# Altium PCB STM32-V5_PCB封装(PADS 2005).PcbDoc (part 2 of 2)
Units mil, origin at the board's own origin, x right, y up, seen from the top; angles counter-clockwise.
Board outline 7066.93 x 5511.81 mil, 2 copper layers (Top, BOTTOM), stack 4.02 mil thick; 397 components, 352 nets, 1643 pads, 387 vias.
Unrouted connection lines stored in the file: 1.
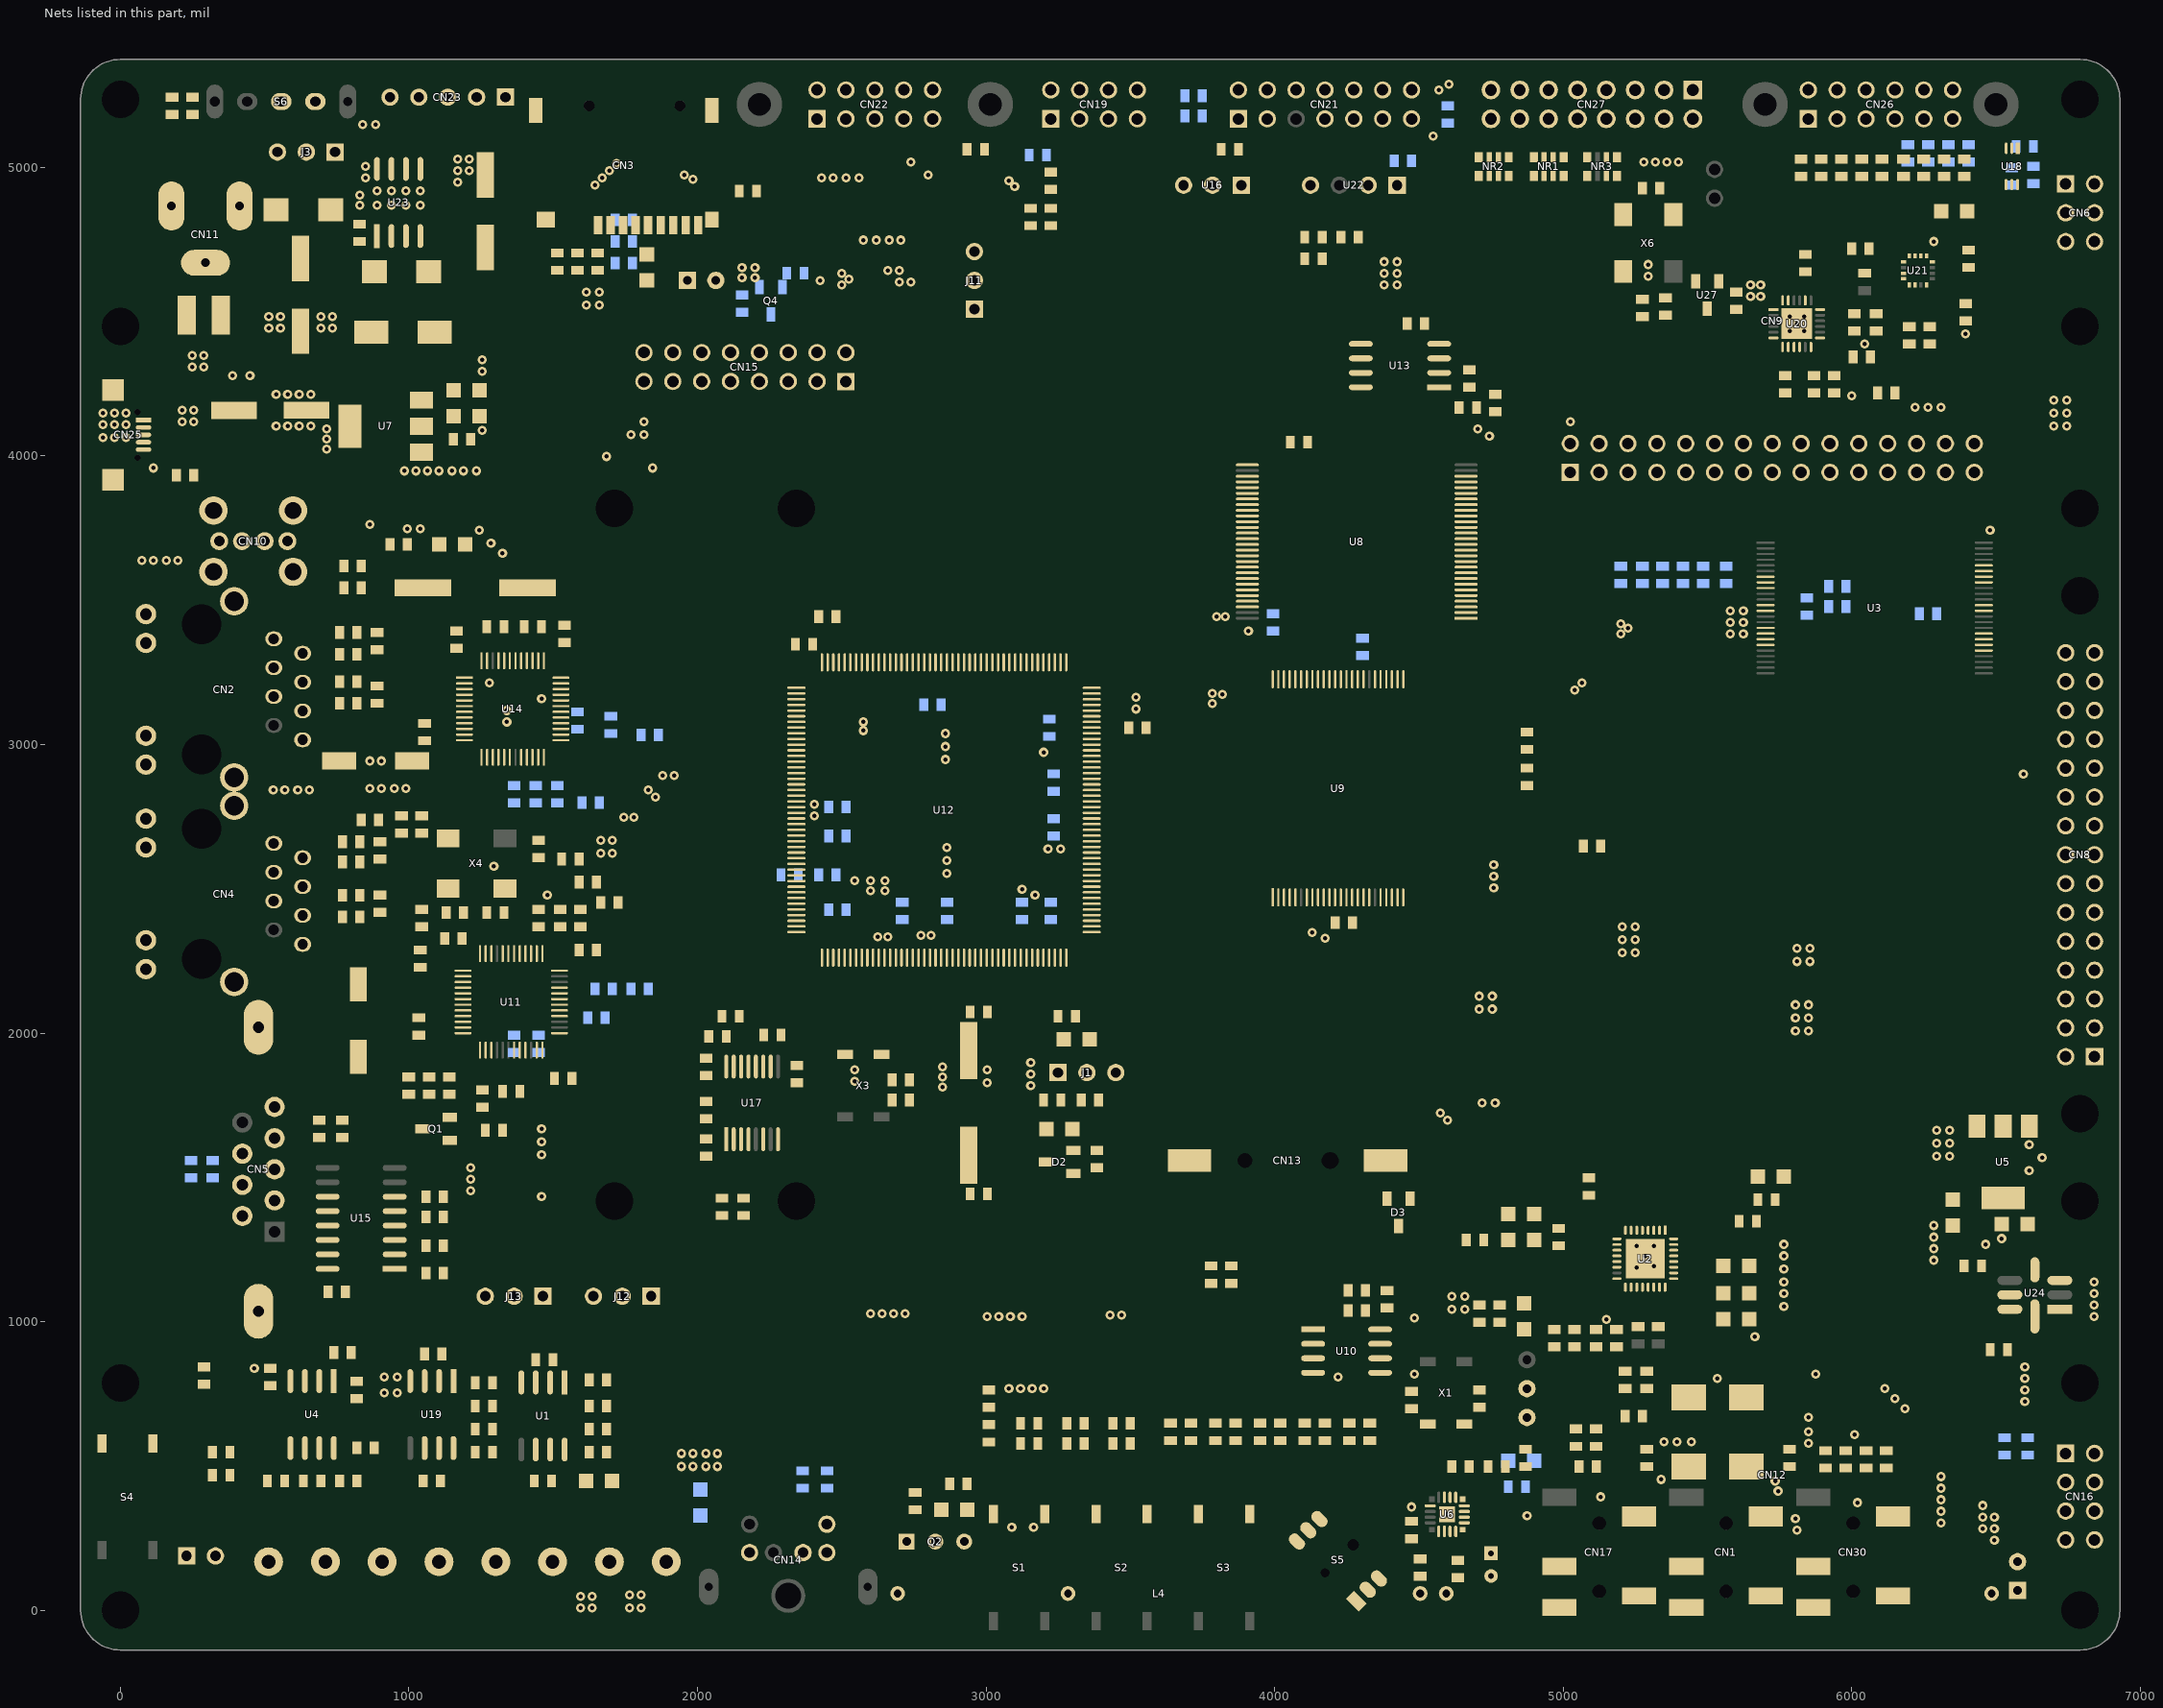
[diagram p2: the nets of this part, all layers, seen from the top]

## Footprints (in the part's own frame and the unit in brackets; to place one, negate y for a bottom-side part, rotate by r counter-clockwise, add the part's x,y. Pads: shape width x height; smd on the part's side, far side on the other; paste and mask are expansions set on the pad) (continued)
MODULE-WIFI/88W8686/10P/2.54MM(PAI-MU) [mil]
  rect 60x60 hole 40: 1(-200,0)
  round 60 hole 40: 2(-200,100) 3(-100,0) 4(-100,100) 5(0,0) 6(0,100) 7(100,0) 8(100,100) 9(200,0) 10(200,100)
  round 157.48 hole 78.74: 11(400,50) 12(-400,50)
  silkscreen extent -297,-50 275,150
NR-0603N-JL [mm]
  rect 0.71x0.89 smd: 1(-1.31,-0.825) 2(-1.31,0.825) 7(1.31,-0.825) 8(1.31,0.825)
  rect 0.46x0.89 smd: 3(-0.395,-0.825) 4(-0.395,0.825) 5(0.395,-0.825) 6(0.395,0.825)
  silkscreen extent -2.1,-1.65 2.1,1.65
O-SW/SS-12F45 [mm]
  oval 1.8x1.5 hole 0.9 slot 1.2 at 0 deg: 1(0,0) 2(3,0) 3(6,0)
  oval 1.5x3 hole 0.9 slot 2.4 at 90 deg: 4(-2.85,0)
  oval 1.5x3 hole 0.8 slot 2.4 at 90 deg: 5(8.85,0)
  silkscreen extent -2.85,-2.8 8.85,2.8
Q-IR-RECIVER/HS0038B-JL [mm]
  rect 1.4x1.4 hole 0.762: 1(-2.54,0)
  round 1.4 hole 0.762: 2(0,0) 3(2.54,0)
  silkscreen extent -3.4,-4.36 3.4,1.02
Q-红外发射-04/C-JL [mil]
  rect 60x60 hole 30: 1(0,49.21)
  round 60 hole 30: 2(0,-49.21)
  silkscreen extent -92,-96 127,131
QFN24-0.5-JL [mm]
  rect 0.9x0.25 smd: 1(-2.05,1.25)
  oval 0.9x0.25 smd: 2(-2.05,0.75) 3(-2.05,0.25) 4(-2.05,-0.25) 5(-2.05,-0.75) 6(-2.05,-1.25) 13(2.05,-1.25) 14(2.05,-0.75) 15(2.05,-0.25) 16(2.05,0.25) 17(2.05,0.75) 18(2.05,1.25)
  oval 0.25x0.9 smd: 7(-1.25,-2.05) 8(-0.75,-2.05) 9(-0.25,-2.05) 10(0.25,-2.05) 11(0.75,-2.05) 12(1.25,-2.05) 19(1.25,2.05) 20(0.75,2.05) 21(0.25,2.05) 22(-0.25,2.05) 23(-0.75,2.05) 24(-1.25,2.05)
  rect 2.7x2.7 smd: 25(0,0)
  silkscreen extent -3,-2 2,2.02
QFN32-0.5-JL [mm]
  rect 0.8x0.25 smd: 1(-2.5,1.75)
  oval 0.8x0.25 smd: 2(-2.5,1.25) 3(-2.5,0.75) 4(-2.5,0.25) 5(-2.5,-0.25) 6(-2.5,-0.75) 7(-2.5,-1.25) 8(-2.5,-1.75) 17(2.5,-1.75) 18(2.5,-1.25) 19(2.5,-0.75) 20(2.5,-0.25) 21(2.5,0.25) 22(2.5,0.75) 23(2.5,1.25) 24(2.5,1.75)
  oval 0.25x0.8 smd: 9(-1.75,-2.5) 10(-1.25,-2.5) 11(-0.75,-2.5) 12(-0.25,-2.5) 13(0.25,-2.5) 14(0.75,-2.5) 15(1.25,-2.5) 16(1.75,-2.5) 25(1.75,2.5) 26(1.25,2.5) 27(0.75,2.5) 28(0.25,2.5) 29(-0.25,2.5) 30(-0.75,2.5) 31(-1.25,2.5) 32(-1.75,2.5)
  rect 3.45x3.45 smd: 33(0,0)
  silkscreen extent -3.5,-2.5 2.51,2.51
QFP48-0.5-JL [mm]
  rect 0.2x1.5 smd: 1(2.75,4.25)
  oval 0.2x1.5 smd: 2(2.25,4.25) 3(1.75,4.25) 4(1.25,4.25) 5(0.75,4.25) 6(0.25,4.25) 7(-0.25,4.25) 8(-0.75,4.25) 9(-1.25,4.25) 10(-1.75,4.25) 11(-2.25,4.25) 12(-2.75,4.25) 25(-2.75,-4.25) 26(-2.25,-4.25) 27(-1.75,-4.25) 28(-1.25,-4.25) 29(-0.75,-4.25) 30(-0.25,-4.25) 31(0.25,-4.25) 32(0.75,-4.25) 33(1.25,-4.25) 34(1.75,-4.25) 35(2.25,-4.25) 36(2.75,-4.25)
  oval 1.5x0.2 smd: 13(-4.25,2.75) 14(-4.25,2.25) 15(-4.25,1.75) 16(-4.25,1.25) 17(-4.25,0.75) 18(-4.25,0.25) 19(-4.25,-0.25) 20(-4.25,-0.75) 21(-4.25,-1.25) 22(-4.25,-1.75) 23(-4.25,-2.25) 24(-4.25,-2.75) 37(4.25,-2.75) 38(4.25,-2.25) 39(4.25,-1.75) 40(4.25,-1.25) 41(4.25,-0.75) 42(4.25,-0.25) 43(4.25,0.25) 44(4.25,0.75) 45(4.25,1.25) 46(4.25,1.75) 47(4.25,2.25) 48(4.25,2.75)
  silkscreen extent -2.97,-2.96 3.24,5.85
SO8N-JL [mm]
  rect 0.508x2.1 smd: 1(-1.905,-2.95)
  oval 0.508x2.1 smd: 2(-0.635,-2.95) 3(0.635,-2.95) 4(1.905,-2.95) 5(1.905,2.95) 6(0.635,2.95) 7(-0.635,2.95) 8(-1.905,2.95)
  silkscreen extent -2.41,-1.65 2.41,1.65
SO8N-W-JL [mm]
  rect 0.508x2.1 smd: 1(-1.905,-3.45)
  oval 0.508x2.1 smd: 2(-0.635,-3.45) 3(0.635,-3.45) 4(1.905,-3.45) 5(1.905,3.45) 6(0.635,3.45) 7(-0.635,3.45) 8(-1.905,3.45)
  silkscreen extent -2.41,-1.65 2.41,1.65
SO16N-JL [mm]
  rect 0.508x2.1 smd: 1(-4.445,-2.95)
  oval 0.508x2.1 smd: 2(-3.175,-2.95) 3(-1.905,-2.95) 4(-0.635,-2.95) 5(0.635,-2.95) 6(1.905,-2.95) 7(3.175,-2.95) 8(4.445,-2.95) 9(4.445,2.95) 10(3.175,2.95) 11(1.905,2.95) 12(0.635,2.95) 13(-0.635,2.95) 14(-1.905,2.95) 15(-3.175,2.95) 16(-4.445,2.95)
  silkscreen extent -4.95,-1.65 4.95,1.65
SOD106-JL [mm]
  rect 2.2x2.032 smd: 1(2.4,0) 2(-2.4,0)
  silkscreen extent -3.8,-1.52 3.7,1.52
SOP16-0.65-JL [mm]
  rect 0.35x2.1 smd: 1(-2.275,-3.2)
  oval 0.35x2.1 smd: 2(-1.625,-3.2) 3(-0.975,-3.2) 4(-0.325,-3.2) 5(0.325,-3.2) 6(0.975,-3.2) 7(1.625,-3.2) 8(2.275,-3.2) 9(2.275,3.2) 10(1.625,3.2) 11(0.975,3.2) 12(0.325,3.2) 13(-0.325,3.2) 14(-0.975,3.2) 15(-1.625,3.2) 16(-2.275,3.2)
  silkscreen extent -2.91,-4.72 2.91,4.69
SOP48-0.5/NAND_FLASH [mm]
  rect 0.2x1.6 smd: 1(-5.75,-9.6)
  oval 0.2x1.6 smd: 2(-5.25,-9.6) 3(-4.75,-9.6) 4(-4.25,-9.6) 5(-3.75,-9.6) 6(-3.25,-9.6) 7(-2.75,-9.6) 8(-2.25,-9.6) 9(-1.75,-9.6) 10(-1.25,-9.6) 11(-0.75,-9.6) 12(-0.25,-9.6) 13(0.25,-9.6) 14(0.75,-9.6) 15(1.25,-9.6) 16(1.75,-9.6) 17(2.25,-9.6) 18(2.75,-9.6) 19(3.25,-9.6) 20(3.75,-9.6) 21(4.25,-9.6) 22(4.75,-9.6) 23(5.25,-9.6) 24(5.75,-9.6) 25(5.75,9.6) 26(5.25,9.6) 27(4.75,9.6) 28(4.25,9.6) 29(3.75,9.6) 30(3.25,9.6) 31(2.75,9.6) 32(2.25,9.6) 33(1.75,9.6) 34(1.25,9.6) 35(0.75,9.6) 36(0.25,9.6) 37(-0.25,9.6) 38(-0.75,9.6) 39(-1.25,9.6) 40(-1.75,9.6) 41(-2.25,9.6) 42(-2.75,9.6) 43(-3.25,9.6) 44(-3.75,9.6) 45(-4.25,9.6) 46(-4.75,9.6) 47(-5.25,9.6) 48(-5.75,9.6)
  silkscreen extent -6.35,-8.6 6.35,8.6
SOP48-0.5/W-JL [mm]
  rect 0.2x1.6 smd: 1(-5.75,-9.6)
  oval 0.2x1.6 smd: 2(-5.25,-9.6) 3(-4.75,-9.6) 4(-4.25,-9.6) 5(-3.75,-9.6) 6(-3.25,-9.6) 7(-2.75,-9.6) 8(-2.25,-9.6) 9(-1.75,-9.6) 10(-1.25,-9.6) 11(-0.75,-9.6) 12(-0.25,-9.6) 13(0.25,-9.6) 14(0.75,-9.6) 15(1.25,-9.6) 16(1.75,-9.6) 17(2.25,-9.6) 18(2.75,-9.6) 19(3.25,-9.6) 20(3.75,-9.6) 21(4.25,-9.6) 22(4.75,-9.6) 23(5.25,-9.6) 24(5.75,-9.6) 25(5.75,9.6) 26(5.25,9.6) 27(4.75,9.6) 28(4.25,9.6) 29(3.75,9.6) 30(3.25,9.6) 31(2.75,9.6) 32(2.25,9.6) 33(1.75,9.6) 34(1.25,9.6) 35(0.75,9.6) 36(0.25,9.6) 37(-0.25,9.6) 38(-0.75,9.6) 39(-1.25,9.6) 40(-1.75,9.6) 41(-2.25,9.6) 42(-2.75,9.6) 43(-3.25,9.6) 44(-3.75,9.6) 45(-4.25,9.6) 46(-4.75,9.6) 47(-5.25,9.6) 48(-5.75,9.6)
  silkscreen extent -6.35,-10.98 6.35,11.05
SOP56-0.5/W-JL [mil]
  rect 10x80 smd: 1(-265.75,-379)
  oval 10x80 smd: 2(-246.06,-379) 3(-226.38,-379) 4(-206.69,-379) 5(-187.01,-379) 6(-167.32,-379) 7(-147.64,-379) 8(-127.95,-379) 9(-108.27,-379) 10(-88.58,-379) 11(-68.9,-379) 12(-49.21,-379) 13(-29.53,-379) 14(-9.84,-379) 15(9.84,-379) 16(29.53,-379) 17(49.21,-379) 18(68.9,-379) 19(88.58,-379) 20(108.27,-379) 21(127.95,-379) 22(147.64,-379) 23(167.32,-379) 24(187.01,-379) 25(206.69,-379) 26(226.38,-379) 27(246.06,-379) 28(265.75,-379) 29(265.75,379) 30(246.06,379) 31(226.38,379) 32(206.69,379) 33(187.01,379) 34(167.32,379) 35(147.64,379) 36(127.95,379) 37(108.27,379) 38(88.58,379) 39(68.9,379) 40(49.21,379) 41(29.53,379) 42(9.84,379) 43(-9.84,379) 44(-29.53,379) 45(-49.21,379) 46(-68.9,379) 47(-88.58,379) 48(-108.27,379) 49(-127.95,379) 50(-147.64,379) 51(-167.32,379) 52(-187.01,379) 53(-206.69,379) 54(-226.38,379) 55(-246.06,379) 56(-265.75,379)
  silkscreen extent -293,-447 293,447
SOT23-JL [mm]
  rect 1.27x0.8 smd: 1(1.205,-1.015) 2(1.205,1.015) 3(-1.205,0)
  silkscreen extent -1.01,-1.3 0.39,1.3
SOT223-JL [mm]
  rect 2x1.5 smd: 1(3.15,-2.3) 2(3.15,0) 3(3.15,2.3)
  rect 2x3.8 smd: 4(-3.15,0)
  silkscreen extent -1.65,-3.17 1.65,3.17
U-DHT11/2.54/4P [mil]
  rect 60x60 / inner round 60 / far side round 60 hole 36: 1(-150,0)
  round 60 hole 36: 2(-50,0) 3(50,0)
  round 60 / inner rect 60x60 / far side rect 60x60 hole 36: 4(150,0)
  silkscreen extent -248,-138 248,98
U-DS18B20/2.54/3P [mil]
  rect 60x60 hole 36: 1(0,0)
  round 60 hole 36: 2(100,0) 3(200,0)
  silkscreen extent -50,-50 250,100
U-LQFP176-0.5 [mm]
  oval 0.22x1.6 smd: 1(-10.75,-13) 2(-10.25,-13) 3(-9.75,-13) 4(-9.25,-13) 5(-8.75,-13) 6(-8.25,-13) 7(-7.75,-13) 8(-7.25,-13) 9(-6.75,-13) 10(-6.25,-13) 11(-5.75,-13) 12(-5.25,-13) 13(-4.75,-13) 14(-4.25,-13) 15(-3.75,-13) 16(-3.25,-13) 17(-2.75,-13) 18(-2.25,-13) 19(-1.75,-13) 20(-1.25,-13) 21(-0.75,-13) 22(-0.25,-13) 23(0.25,-13) 24(0.75,-13) 25(1.25,-13) 26(1.75,-13) 27(2.25,-13) 28(2.75,-13) 29(3.25,-13) 30(3.75,-13) 31(4.25,-13) 32(4.75,-13) 33(5.25,-13) 34(5.75,-13) 35(6.25,-13) 36(6.75,-13) 37(7.25,-13) 38(7.75,-13) 39(8.25,-13) 40(8.75,-13) 41(9.25,-13) 42(9.75,-13) 43(10.25,-13) 44(10.75,-13) 89(10.75,13) 90(10.25,13) 91(9.75,13) 92(9.25,13) 93(8.75,13) 94(8.25,13) 95(7.75,13) 96(7.25,13) 97(6.75,13) 98(6.25,13) 99(5.75,13) 100(5.25,13) 101(4.75,13) 102(4.25,13) 103(3.75,13) 104(3.25,13) 105(2.75,13) 106(2.25,13) 107(1.75,13) 108(1.25,13) 109(0.75,13) 110(0.25,13) 111(-0.25,13) 112(-0.75,13) 113(-1.25,13) 114(-1.75,13) 115(-2.25,13) 116(-2.75,13) 117(-3.25,13) 118(-3.75,13) 119(-4.25,13) 120(-4.75,13) 121(-5.25,13) 122(-5.75,13) 123(-6.25,13) 124(-6.75,13) 125(-7.25,13) 126(-7.75,13) 127(-8.25,13) 128(-8.75,13) 129(-9.25,13) 130(-9.75,13) 131(-10.25,13) 132(-10.75,13)
  oval 1.6x0.22 smd: 45(13,-10.75) 46(13,-10.25) 47(13,-9.75) 48(13,-9.25) 49(13,-8.75) 50(13,-8.25) 51(13,-7.75) 52(13,-7.25) 53(13,-6.75) 54(13,-6.25) 55(13,-5.75) 56(13,-5.25) 57(13,-4.75) 58(13,-4.25) 59(13,-3.75) 60(13,-3.25) 61(13,-2.75) 62(13,-2.25) 63(13,-1.75) 64(13,-1.25) 65(13,-0.75) 66(13,-0.25) 67(13,0.25) 68(13,0.75) 69(13,1.25) 70(13,1.75) 71(13,2.25) 72(13,2.75) 73(13,3.25) 74(13,3.75) 75(13,4.25) 76(13,4.75) 77(13,5.25) 78(13,5.75) 79(13,6.25) 80(13,6.75) 81(13,7.25) 82(13,7.75) 83(13,8.25) 84(13,8.75) 85(13,9.25) 86(13,9.75) 87(13,10.25) 88(13,10.75) 133(-13,10.75) 134(-13,10.25) 135(-13,9.75) 136(-13,9.25) 137(-13,8.75) 138(-13,8.25) 139(-13,7.75) 140(-13,7.25) 141(-13,6.75) 142(-13,6.25) 143(-13,5.75) 144(-13,5.25) 145(-13,4.75) 146(-13,4.25) 147(-13,3.75) 148(-13,3.25) 149(-13,2.75) 150(-13,2.25) 151(-13,1.75) 152(-13,1.25) 153(-13,0.75) 154(-13,0.25) 155(-13,-0.25) 156(-13,-0.75) 157(-13,-1.25) 158(-13,-1.75) 159(-13,-2.25) 160(-13,-2.75) 161(-13,-3.25) 162(-13,-3.75) 163(-13,-4.25) 164(-13,-4.75) 165(-13,-5.25) 166(-13,-5.75) 167(-13,-6.25) 168(-13,-6.75) 169(-13,-7.25) 170(-13,-7.75) 171(-13,-8.25) 172(-13,-8.75) 173(-13,-9.25) 174(-13,-9.75) 175(-13,-10.25) 176(-13,-10.75)
  silkscreen extent -12,-14.5 12,12
U-SI4730-QFN-20P-0.5 [mm]
  rect 0.5x0.5 smd: 1(-1.35,1.35) 6(-1.35,-1.35) 11(1.35,-1.35) 16(1.35,1.35)
  oval 1x0.28 smd: 2(-1.5,0.75) 3(-1.5,0.25) 4(-1.5,-0.25) 5(-1.5,-0.75) 12(1.5,-0.75) 13(1.5,-0.25) 14(1.5,0.25) 15(1.5,0.75)
  oval 0.28x1 smd: 7(-0.75,-1.5) 8(-0.25,-1.5) 9(0.25,-1.5) 10(0.75,-1.5) 17(0.75,1.5) 18(0.25,1.5) 19(-0.25,1.5) 20(-0.75,1.5)
  rect 1.4x1.4 smd: 21(0,0)
  silkscreen extent -2.1,1 -1.8,1.6
WSOF6I [mm]
  rect 0.35x1 smd: 1(-0.525,-1.6)
  oval 0.25x1 smd: 2(0,-1.6) 3(0.5,-1.6) 4(0.5,1.6) 5(0,1.6) 6(-0.5,1.6)
  silkscreen extent -0.8,-2.71 0.8,0.9
X-0705/7X5MM [mm]
  rect 2x1.6 smd: 1(-2.5,-2.2) 2(2.5,-2.2) 3(2.5,2.2) 4(-2.5,2.2)
  silkscreen extent -4.23,-2.7 3.5,2.5
X-1105/A-JL [mm]
  rect 5x1.5 smd: 1(-4.6,0) 2(4.6,0)
  silkscreen extent -5.7,-2.3 5.7,2.3
XTAL/MC-306/3.8X8MM [mm]
  rect 0.8x1.4 smd: 1(-2.75,-1.6) 2(-2.75,1.6) 3(2.75,1.6) 4(2.75,-1.6)
  silkscreen extent -4.1,-2.35 4,1.6
安装HOLE-3-JL [mm]
  round 3.2 hole 3.302 unplated: 1(0,0)
  Keep-Out Layer pour cut-out: 3.5,0 3.234,1.339 2.475,2.475 1.339,3.234 0,3.5 0,3.5 -1.339,3.234 -2.475,2.475 -3.234,1.339 -3.5,0 -3.5,0 -3.234,-1.339 -2.475,-2.475 -1.339,-3.234 0,-3.5 0,-3.5 1.339,-3.234 2.475,-2.475 3.234,-1.339 3.5,0

## Via types
v1: diameter 32/32 (per signal layer), hole 15, Top to BOTTOM, 387 vias

## Nets (pads, with @x,y where several pads share a name; then routed paths per layer and width w, separated by ;. In a path a pad name is that pad's centre, name@x,y a point inside that pad or via, vN(x,y) a via of type N, cw(c..) or ccw(c..) an arc to the next point about the centre after c; other vN are vias at no path point)
$$$415: B1.2 C55.1 C66.2 R100.2
$$$1307: R59.2 U11.36
$$$1603: R16.2 U1.8
$$$1638: C18.2 U15.1
$$$1639: C18.1 U15.3
$$$1640: C14.2 U15.2
$$$1641: C16.2 U15.4
$$$1642: C16.1 U15.5
$$$1643: C15.2 U15.6
$$$1698: R60.2 R71.1 U11.32
$$$1838: R22.1 R72.2 S5.1
$$$1857: R19.1 R103.2 S5.2
$$$1871: R14.1 R105.2 S5.3
$$$1884: R85.1 R110.2 S5.4
$$$1898: R39.1 R121.2 S5.6
$$$2086: R75.1 U11.48
$$$2777: R11.1 R118.2 S3.1
$$$2965: CN14.5 R138.2
$$$2966: CN14.1 R139.2
$$$3467: R30.1 R32.1 U8.32
$$$3504: R31.1 R42.2 U3.9
$$$3811: R69.2 U1.4
$$$3941: R5.1 U15.12
$$$5173: LD4.1 R67.2
$$$5220: C56.2 R164.1 U18.5
$$$5680: R81.1 U15.11
$$$5817: LD5.1 R9.2
$$$5923: C58.2 Q2.3 R163.2
$$$6684: CN22.10 R114.2
$$$7572: R15.1 R68.2 U4.1
$$$8237: CN8.1 R124.1 R125.2
$$$8408: R78.2 R117.2 X4.3
$$$8433: R78.1 U11.43
$$$8766: R10.2 U3.19
$$$9170: CN5.8 R66.2
$$$9182: CN5.6 R127.2
$$$9401: D6.2 L22.2 U23.2
$$$10344: C95.2 U12.81
$$$10360: R79.2 U11.38
$$$10374: C97.1 U12.125
$$$10950: C115.2 R90.2 R91.2
$$$10951: C74.2 R92.2 R93.2
$$$10952: CN4.9 R88.1
$$$10953: CN4.12 R89.1
$$$11507: CN11.1 D4.1
$$$11858: C102.1 U2.30
$$$11873: C101.1 U2.29
$$$12218: CN3.9 R1.1 R112.1
$$$13067: C13.2 U2.27
$$$13433: C130.2 C133.1 D4.2 U23.1
$$$13533: C32.2 C65.2 R35.2 U2.26
$$$13661: R132.1 R134.2 U17.15
$$$13945: R82.2 U11.14
$$$13949: Q1.1 R82.1
$$$14742: R94.2 U11.11
$$$14804: Q1.2 R86.2 U11.12
$$$15069: CN5.7 R66.1
$$$15074: CN5.4 R127.1
$$$15831: R76.1 R77.1 U11.25
$$$15847: CN15.1 J11.2
$$$16055: R7.2 R13.2 U11.19
$$$16293: R95.1 U11.37
$$$16359: R97.1 U11.28
$$$16360: R96.1 R160.2 U11.29
$$$16803: R166.1 U24.8
$$$17040: C4.2 U2.20
$$$17042: C24.2 U2.19
$$$17244: R43.1 R65.1 U9.7
$$$18067: L23.2 S6.2
$$$18319: R116.1 U11.42
$$$18691: R98.2 U19.8
$$$18692: R102.2 U19.4
$$$18693: C57.1 R151.1 R152.1 U19.3
$$$19427: B1.1 C55.2 C67.2 R99.1
$$$20882: C63.2 CN30.4 R162.1
$$$20883: C35.2 CN30.1 R161.1
$$$21143: R153.2 U20.9
$$$21194: C123.2 U20.10
$$$21249: R154.2 U20.12
$$$21648: CN21.6 R44.1
$$$21942: C125.1 U20.20
$$$22016: J3.2 S6.3
$$$22038: R29.1 R57.2 U8.16
$$$22086: CN25.4 R73.2
$$$22510: C102.2 CN1.1 R18.1
$$$22511: C101.2 CN1.4 R129.1
$$$22521: R33.2 R34.2 R128.1 U3.7
$$$23599: C126.2 U21.10
$$$23667: C127.2 U21.12
$$$23668: C127.1 U21.8
$$$23787: R157.1 U21.15
$$$23828: Q2.1 R17.2
$$$24206: R156.2 R159.2 U21.1
$$$24219: R155.2 R158.2 U21.16
$$$24564: C76.1 U2.21
$$$24565: C77.1 U2.22
$$$25002: C2.1 R122.1 R123.1 U1.3
$$$26102: R74.1 R131.2 U12.171
$$$26143: CN26.10 R61.1 R146.2
$$$26145: CN26.12 R87.1 R145.2
$$$26189: CN26.6 R107.1
$$$26436: CN26.7 R150.2
$$$26437: CN26.9 R62.2 R147.2
$$$26438: CN26.11 R64.2 R148.2
$$$26554: C70.2 L6.1 U6.2
$$$26756: CN26.4 R126.1
$$$26757: CN26.3 R108.2
$$$26759: C31.2 C103.2 CN17.1 CN17.4 R133.1
$$$26777: C12.2 C31.1 CN17.2 CN17.3 R135.2
$$$26849: CN26.5 R141.2
$$$27017: C104.2 L21.2 U6.11
$$$27338: R136.1 U2.9
$$$28247: CN27.6 NR3.3
$$$28287: CN27.7 NR3.7
$$$28301: CN27.5 NR3.1
$$$28609: CN27.9 NR1.1
$$$28610: CN27.11 NR1.5
$$$28611: CN27.13 NR2.1
$$$28612: CN27.15 NR2.5
$$$28653: CN27.10 NR1.3
$$$28654: CN27.12 NR1.7
$$$28655: CN27.14 NR2.3
$$$28657: CN27.16 NR2.7
$$$28848: R142.1 R143.2 U17.1
$$$28932: R8.1 R119.2 S2.1
$$$28983: R6.1 R120.2 S1.1
$$$29163: CN27.8 R63.1
$$$29574: C71.2 U6.4
$$$29665: C71.1 L5.2
$$$29922: C70.1 L4.1
$$$30233: D1.2 R47.1
$$$30241: Q4.3 R47.2
$$$30316: Q4.1 R70.1
$$$30694: R26.1 U14.1
$$$30695: R40.1 U14.21
$$$30696: R41.1 U14.20
$$$30697: C44.2 U14.44 X5.1
$$$30698: C54.2 R52.2 R53.2
$$$30699: C48.2 R54.2 R56.2
$$$30700: CN2.9 R27.1
$$$30701: CN2.12 R28.1
$$$30702: C42.2 U14.43 X5.2
$$$30703: R45.1 R58.1 U14.34
$$$31064: C34.2 U6.17 X1.2
$$$31143: C37.2 U6.9 X1.1
$$$32519: LD1.1 R23.2
$$$32525: LD2.1 R24.2
$$$32533: LD3.1 R25.2
+5V: C10.1 C17.1 C29.1 C38.2 C50.1 C110.2 C134.1 CN9.1 CN10.1 CN14.4 CN16.2 CN18.1 CN26.1 J11.1 L23.1 R6.2 R8.2 R11.2 R115.2 R122.2 R151.2 R163.1 U5.3 U7.3 U16.3 U22.1
  other v1: 389.41,4278.11 449.41,4278.11
AUX_CL: R156.1 U20.7
AUX_DA: R155.1 U20.6
BAT_CR1220: CN6.2 CN13.1 D3.2
BOOT0: J2.1 R55.2 U12.166
CAN2_RX: J12.2 R102.1
CAN2_TX: J13.2 U19.1
CANH_1: CN31.2 R36.2 U1.7
CANH_2: CN32.2 R101.2 U19.7
CANL_1: CN31.1 R36.1 U1.6
CANL_2: CN32.1 R101.1 U19.6
CPU_VDDA: C6.2 C61.1 J1.3 L1.2 R149.2 U12.39
CPU_VREF: J1.2 U12.38
DCMI_3.0V: C143.2 CN27.1 R144.2 U27.2 X6.4
DM9K_3.3V: C52.2 C60.2 C73.2 C121.2 L16.2 R27.2 R28.2 R37.2 R40.2 R41.2 R45.2 U14.23 U14.30 U14.42
EXT_5V: C132.1 J3.1 L22.1 U23.3
FM_1: L4.2 L4.3
FM_OUTL: C24.1 U6.14
FM_OUTR: C4.1 U6.13
FSMC_NE3_A: R43.2 U17.4
FSMC_NE3_C: R37.1 U14.37 U17.6
FSMC_NE4_A: R125.1 U17.12
FSMC_NE4_B: CN15.3 U17.11
FSMC_NE4_C: CN9.11 U17.10
GND: C1.1 C2.2 C3.2 C5.2 C6.1 C7.1 C8.1 C9.1 C10.2 C11.2 C13.1 C14.1 C15.1 C17.2 C19.1 C20.1 C21.1 C22.2 C23.1 C25.1 C26.2 C27.1 C28.1 C29.2 C30.1 C32.1 C33.2 C34.1 C36.1 C37.1 C38.1 C39.1 C40.1 C41.1 C42.1 C43.1 C44.1 C45.1 C46.1 C47.1 C48.1 C49.1 C50.2 C51.2 C52.1 C53.1 C54.1 C56.1 C57.2 C58.1 C59.1 C60.1 C61.2 C64.1 C65.1 C69.1 C73.1 C74.1 C83.1 C84.1 C85.1 C86.1 C87.1 C88.1 C89.1 C90.1 C91.1 C92.1 C94.1 C95.1 C96.2 C97.2 C98.2 C99.1 C100.2 C104.1 C105.1 C106.2 C110.1 C114.1 C115.1 C116.2 C117.2 C119.2 C120.2 C121.1 C122.1 C123.1 C124.1 C125.2 C126.1 C128.1 C129.1 C130.1 C132.2 C133.2 C134.2 C143.1 C144.1 CN1.2 CN1.3 CN2.8 CN2.13 CN2.14 CN3.6 CN3.10 CN3.11 CN3.12 CN3.13 CN4.8 CN4.13 CN4.14 CN5.5 CN5.10 CN5.11 CN6.3 CN6.4 CN8.29 CN9.2 CN10.4 CN10.5 CN10.6 CN10.7 CN10.8 CN11.2 CN11.3 CN12.4 CN13.2 CN14.3 CN15.2 CN15.16 CN16.1 CN18.2 CN19.1 CN21.13 CN21.14 CN22.3 CN22.6 CN23.2 CN25.5 CN25.6 CN25.7 CN26.2 CN26.8 CN27.2 CN30.2 CN30.3 D2.3 D6.1 L5.1 L6.2 LD5.2 Q2.2 Q4.2 R4.2 R16.1 R18.2 R26.2 R46.1 R55.1 R57.1 R74.2 R75.2 R79.1 R98.1 R100.1 R129.2 R135.1 R145.1 R146.1 R147.1 R148.1 R153.1 R161.2 R162.2 S1.3 S2.3 S3.3 S4.2 S5.5 U1.2 U2.12 U2.18 U2.24 U2.28 U2.33 U3.13 U3.36 U4.5 U5.1 U6.3 U6.6 U6.12 U6.21 U7.1 U8.33 U8.52 U9.13 U9.37 U10.1 U10.2 U10.3 U10.4 U10.7 U11.5 U11.6 U11.10 U11.15 U11.33 U11.39 U11.44 U11.46 U11.47 U12.14 U12.22 U12.37 U12.48 U12.61 U12.71 U12.90 U12.102 U12.113 U12.126 U12.135 U12.148 U12.158 U13.4 U14.5 U14.6 U14.15 U14.33 U14.41 U14.45 U14.47 U14.48 U15.15 U16.1 U17.8 U18.2 U18.3 U19.2 U20.1 U20.18 U20.25 U21.9 U21.11 U22.4 U23.4 U23.5 U23.6 U23.7 U23.8 U24.1 U27.1 X4.2 X6.2
  other v1: 1594.41,8.11 1634.41,8.11 1764.41,8.11 1804.41,8.11 1594.41,48.11 1634.41,48.11 1764.41,53.11 1804.41,53.11 6494.41,243.11 5809.41,278.11 6454.41,283.11 6494.41,283.11 3089.41,288.11 3164.41,288.11 6309.41,303.11 5804.41,318.11 6454.41,323.11 6494.41,323.11 4874.41,328.11 4599.41,333.11 6309.41,343.11 4474.41,358.11 6454.41,363.11 6019.41,373.11 6309.41,383.11 5129.41,393.11 5744.41,413.11 6309.41,423.11 5734.41,448.11 5339.41,453.11 6309.41,463.11 1944.41,498.11 1984.41,498.11 2029.41,498.11 2069.41,498.11 1944.41,543.11 1984.41,543.11 2029.41,543.11 2069.41,543.11 5849.41,578.11 5349.41,583.11 5394.41,583.11 5444.41,583.11 6009.41,608.11 5849.41,618.11 5849.41,668.11 6184.41,698.11 6599.41,723.11 6149.41,733.11 914.41,753.11 959.41,753.11 6599.41,763.11 3079.41,768.11 3119.41,768.11 3159.41,768.11 3199.41,768.11 6114.41,768.11 5534.41,803.11 6599.41,803.11 914.41,808.11 959.41,808.11 4219.41,808.11 4484.41,818.11 5874.41,818.11 464.41,838.11 6599.41,843.11 5664.41,948.11 5149.41,1008.11 4484.41,1013.11 3004.41,1018.11 3044.41,1018.11 3084.41,1018.11 3124.41,1018.11 6839.41,1018.11 3429.41,1023.11 3469.41,1023.11 2599.41,1028.11 2639.41,1028.11 2679.41,1028.11 2719.41,1028.11 4614.41,1043.11 4659.41,1043.11 5764.41,1053.11 6839.41,1058.11 4614.41,1088.11 4659.41,1088.11 5764.41,1098.11 6839.41,1098.11 5764.41,1138.11 6839.41,1138.11 5764.41,1183.11 5254.41,1188.11 5314.41,1193.11 6284.41,1213.11 5284.41,1228.11 5764.41,1228.11 6284.41,1253.11 5254.41,1263.11 5314.41,1263.11 5764.41,1268.11 6464.41,1268.11 6519.41,1288.11 6284.41,1293.11 6284.41,1333.11 1459.41,1433.11 1214.41,1453.11 1214.41,1493.11 6614.41,1523.11 1214.41,1533.11 6659.41,1568.11 6294.41,1573.11 6339.41,1573.11 1459.41,1578.11 6614.41,1613.11 6294.41,1618.11 6339.41,1618.11 1459.41,1623.11 6294.41,1663.11 6339.41,1663.11 1459.41,1668.11 4599.41,1698.11 4574.41,1723.11 4719.41,1758.11 4764.41,1758.11 2849.41,1813.11 3154.41,1818.11 3004.41,1828.11 2544.41,1833.11 2849.41,1848.11 3154.41,1858.11 2544.41,1873.11 3004.41,1873.11 2849.41,1883.11 3154.41,1898.11 5804.41,2008.11 5849.41,2008.11 5804.41,2053.11 5849.41,2053.11 4709.41,2083.11 4754.41,2083.11 5804.41,2098.11 5849.41,2098.11 4709.41,2128.11 4754.41,2128.11 5809.41,2248.11 5854.41,2248.11 5204.41,2278.11 5249.41,2278.11 5809.41,2293.11 5854.41,2293.11 5204.41,2323.11 5249.41,2323.11 4174.41,2328.11 2624.41,2333.11 2659.41,2333.11 2774.41,2338.11 2809.41,2338.11 4129.41,2348.11 5204.41,2368.11 5249.41,2368.11 1479.41,2478.11 3169.41,2478.11 2599.41,2493.11 2649.41,2493.11 3124.41,2498.11 4759.41,2503.11 2544.41,2528.11 2599.41,2528.11 2649.41,2528.11 4759.41,2543.11 2864.41,2553.11 1294.41,2578.11 4759.41,2583.11 2864.41,2598.11 1664.41,2623.11 1704.41,2623.11 3214.41,2638.11 3258.41,2638.11 2864.41,2643.11 1664.41,2668.11 1704.41,2668.11 1744.41,2748.11 1779.41,2748.11 2404.41,2753.11 2404.41,2793.11 1854.41,2818.11 529.41,2843.11 569.41,2843.11 614.41,2843.11 654.41,2843.11 1829.41,2843.11 864.41,2848.11 904.41,2848.11 949.41,2848.11 989.41,2848.11 1879.41,2893.11 1919.41,2893.11 6594.41,2898.11 864.41,2943.11 904.41,2943.11 2859.41,2948.11 3199.41,2973.11 2859.41,2993.11 2859.41,3038.11 2574.41,3048.11 1339.41,3078.11 2574.41,3078.11 1339.41,3118.11 3519.41,3123.11 3783.41,3142.11 1459.41,3158.11 3519.41,3163.11 3819.41,3173.11 3783.41,3177.11 5039.41,3188.11 1279.41,3213.11 5064.41,3213.11 5199.41,3383.11 5579.41,3383.11 5624.41,3383.11 3909.41,3393.11 5224.41,3403.11 5199.41,3418.11 5579.41,3423.11 5624.41,3423.11 3799.41,3443.11 3829.41,3443.11 5579.41,3463.11 5624.41,3463.11 74.41,3638.11 114.41,3638.11 159.41,3638.11 199.41,3638.11 1324.41,3663.11 1284.41,3698.11 1244.41,3743.11 6479.41,3743.11 994.41,3748.11 1039.41,3748.11 864.41,3763.11 984.41,3948.11 1024.41,3948.11 1064.41,3948.11 1104.41,3948.11 1149.41,3948.11 1189.41,3948.11 1234.41,3948.11 114.41,3958.11 1844.41,3958.11 1684.41,3998.11 714.41,4023.11 714.41,4058.11 -60.59,4063.11 -20.59,4063.11 19.41,4063.11 4744.41,4068.11 1769.41,4073.11 1814.41,4073.11 1254.41,4088.11 714.41,4093.11 4704.41,4093.11 539.41,4103.11 579.41,4103.11 619.41,4103.11 659.41,4103.11 6699.41,4103.11 6744.41,4103.11 -60.59,4108.11 -20.59,4108.11 19.41,4108.11 214.41,4118.11 254.41,4118.11 1814.41,4118.11 5024.41,4118.11 -60.59,4148.11 -20.59,4148.11 19.41,4148.11 6699.41,4148.11 6744.41,4148.11 214.41,4158.11 254.41,4158.11 6219.41,4168.11 6264.41,4168.11 6309.41,4168.11 6699.41,4193.11 6744.41,4193.11 5999.41,4208.11 539.41,4213.11 579.41,4213.11 619.41,4213.11 659.41,4213.11 1254.41,4293.11 249.41,4308.11 289.41,4308.11 1254.41,4333.11 249.41,4348.11 289.41,4348.11 6044.41,4388.11 6394.41,4423.11 5784.41,4433.11 5834.41,4433.11 514.41,4443.11 554.41,4443.11 694.41,4443.11 734.41,4443.11 5809.41,4458.11 514.41,4483.11 554.41,4483.11 694.41,4483.11 734.41,4483.11 5784.41,4483.11 5834.41,4483.11 1614.41,4523.11 1659.41,4523.11 5649.41,4553.11 5684.41,4553.11 1614.41,4568.11 1659.41,4568.11 2499.41,4593.11 4379.41,4593.11 4424.41,4593.11 5649.41,4593.11 5684.41,4593.11 2699.41,4603.11 2739.41,4603.11 2424.41,4608.11 2524.41,4613.11 2154.41,4618.11 2199.41,4618.11 5294.41,4623.11 2499.41,4633.11 4379.41,4633.11 4424.41,4633.11 2659.41,4643.11 2699.41,4643.11 2154.41,4653.11 2199.41,4653.11 5294.41,4663.11 4379.41,4673.11 4424.41,4673.11 6284.41,4743.11 2574.41,4748.11 2619.41,4748.11 2664.41,4748.11 2704.41,4748.11 829.41,4868.11 889.41,4868.11 939.41,4868.11 989.41,4868.11 1039.41,4868.11 829.41,4903.11 889.41,4918.11 939.41,4918.11 989.41,4918.11 1039.41,4918.11 3099.41,4933.11 1644.41,4938.11 1169.41,4948.11 3079.41,4953.11 1984.41,4958.11 849.41,4963.11 1669.41,4963.11 2429.41,4963.11 2469.41,4963.11 2514.41,4963.11 2559.41,4963.11 1954.41,4973.11 2799.41,4973.11 1169.41,4988.11 1209.41,4988.11 1694.41,4988.11 849.41,5003.11 1719.41,5013.11 2739.41,5018.11 5279.41,5018.11 5319.41,5018.11 5359.41,5018.11 5399.41,5018.11 1169.41,5028.11 1209.41,5028.11 4549.41,5108.11 839.41,5148.11 884.41,5148.11 4569.41,5268.11 4604.41,5288.11
I2C2_SCL: CN27.3 R20.1 R137.1 R159.1 U2.16 U6.7 U10.6 U18.6 U20.23 U24.6
I2C2_SDA: CN27.4 R21.1 R140.1 R158.1 U2.17 U6.8 U10.5 U18.4 U20.24 U24.7
JTCK-SWCLK: CN23.4 U12.137
JTMS-SWDIO: CN23.3 U12.124
LCD_3.3V: C5.1 CN8.30 U5.2 U5.4
LIN: C66.1 U2.2
LINKACT1: CN2.10 U14.38
LINKACT2: CN4.10 R83.2 U11.13
LIP: C67.1 U2.1
MICBIAS: C1.2 R99.2 R133.2 U2.32
NRST: C53.2 CN8.5 CN15.4 CN23.5 R84.1 R166.2 S4.4 U6.5 U8.14 U11.40 U12.31 U14.40
PA0/ADC123_IN0: R62.1 U12.40
PA1/ETH_RMII_REF_CLK: R116.2 R117.1 U12.41
PA2/USART2_TX/ETH_MDIO: CN6.6 R77.2 U12.42
PA3/USART2_RX: CN6.5 U12.47
PA4/NRF905_TX_EN/NRF24L01_CE/DAC1_OUT: CN19.3 CN21.2 R150.1 U12.50
PA5/NRF905_TRX_CE/VS1053_XDCS/DAC2_OUT: CN21.3 R107.2 U12.51
PA6/DCMI_PIXCLK: NR3.4 U12.52
PA7/RMII_CRS_DV: R95.2 U12.53
PA8/IR_TX: R70.2 U12.119
PA9/USART1_TX: R81.2 U12.120
PA10/USART1_RX: R5.2 R73.1 U12.121
PA11/OTG_FS_DM: CN25.2 U12.122
PA12/OTG_FS_DP: CN25.3 U12.123
PA15/DM9000_INT: R58.2 U12.138
PB0/IR_RX: R17.1 U12.56
PB1/1-WIRE: R115.1 U12.57 U16.2 U22.2
PB2-BOOT1/RS485_TXEN: R46.2 U4.2 U4.3 U12.58
PB3/SPI3_SCK: CN8.24 CN19.5 CN21.11 U12.161 U13.6
PB4/SPI3_MISO: CN8.25 CN19.7 CN21.9 U12.162 U13.2
PB5/SPI3_MOSI: CN8.26 CN19.6 CN21.10 J12.1 U12.163 U13.5
PB6/CAN2_TX/NRF905_PWR_UP: CN21.4 J13.3 R80.1 U12.164
PB7/GPRS_RESET: CN16.8 U12.165
PB8/NRF905_DR/VS1053_DREQ: CN21.8 U12.167
PB9/NRF905_AM: CN21.7 U12.168
PB10/USART3_TX: U4.4 U12.79
PB11/USART3_RX: R68.1 U12.80
PB12/I2S2_WS/CAN2_RX: J12.3 U2.7 U12.92
PB13/I2S2_CK/CAN2_TX/ETH_RMII_TXD1: J13.1 R7.1 U2.8 U12.93
PB14/OTG_HS_DM: CN10.2 U12.94
PB15/OTG_HS_DP: CN10.3 U12.95
PC0/ADC123_IN10: R61.2 U12.32
PC1/ETH_MDC: U11.24 U12.33
PC2/NRF905_CSN/VS1053_XCS: CN21.12 LD4.2 R104.2 U12.34
PC3/I2S2_SD: U2.10 U12.35
PC4/ETH_RMII_RX_D0: R96.2 U12.54
PC5/ETH_RMII_RX_D1: R97.2 U12.55
PC6/I2S2_MCK: U2.11 U12.115
PC7/USART6_RX: CN16.4 U12.116
PC8/SDIO_D0: CN3.7 CN22.7 R51.1 U12.117
PC9/SDIO_D1: CN3.8 CN22.8 R111.1 U12.118
PC10/SDIO_D2: CN3.1 CN22.9 R48.1 U12.139
PC11/SDIO_D3: CN3.2 CN22.1 R49.1 U12.140
PC12/SDIO_CK: CN3.5 CN22.5 U12.141
PC13/KEY2: R119.1 U12.8
PC14-OSC32_IN: C40.2 U12.9 X3.1
PC15-OSC32_OUT: C45.2 U12.10 X3.2
PD0/FSMC_D2: CN8.8 CN9.17 CN15.10 U3.31 U8.39 U9.10 U12.142 U14.16
PD1/FSMC_D3: CN8.9 CN9.18 CN15.11 U3.32 U8.41 U9.11 U12.143 U14.14
PD2/SDIO_CMD: CN3.3 CN22.2 R50.1 U12.144
PD3/LCD_BUSY: CN8.22 U12.145
PD4/FSMC_NOE: CN8.4 CN9.10 CN15.7 U3.8 U8.34 U9.44 U12.146 U14.35
PD5/FSMC_NWE: CN8.3 CN9.14 CN15.6 U3.18 U8.13 U9.18 U12.147 U14.36
PD6/FSMC_NWAIT: R12.1 R34.1 U8.17 U12.150
PD7/FSMC_NCE2: R42.1 U12.151
PD8/FSMC_D13: CN8.19 CN9.28 U8.47 U9.39 U12.96 U14.25
PD9/FSMC_D14: CN8.20 CN9.29 U8.49 U9.40 U12.97 U14.24
PD10/FSMC_D15: CN8.21 CN9.30 U8.51 U9.41 U12.98 U14.22
PD11/FSMC_CLE/FSMC_A16: U3.16 U8.54 U9.23 U12.99
PD12/FSMC_ALE/FSMC_A17: U3.17 U8.19 U9.22 U12.100
PD13/FSMC_A18: CN8.2 CN15.5 U8.18 U9.21 U12.101 U14.32
PD14/FSMC_D0: CN8.6 CN9.15 CN15.8 U3.29 U8.35 U9.8 U12.104 U14.18
PD15/FSMC_D1: CN8.7 CN9.16 CN15.9 U3.30 U8.37 U9.9 U12.105 U14.17
PE0/FSMC_NBL0: U9.42 U12.169
PE1/FSMC_NBL1: U9.43 U12.170
PE2/FSMC_A23/SD_DETECT: R1.2 R114.1 U8.1 U12.1
PE3/FSMC_A19: U8.11 U9.20 U12.2
PE4/FSMC_A20: U8.12 U12.3 U17.2 U17.14
PE5/FSMC_A21: U8.15 U12.4 U17.3 U17.13
PE6/FSMC_A22: U8.2 U12.5
PE7/FSMC_D4: CN8.10 CN9.19 CN15.12 U3.41 U8.44 U9.14 U12.68 U14.13
PE8/FSMC_D5: CN8.11 CN9.20 CN15.13 U3.42 U8.46 U9.15 U12.69 U14.12
PE9/FSMC_D6: CN8.12 CN9.21 CN15.14 U3.43 U8.48 U9.16 U12.70 U14.11
PE10/FSMC_D7: CN8.13 CN9.22 CN15.15 U3.44 U8.50 U9.17 U12.73 U14.10
PE11/FSMC_D8: CN8.14 CN9.23 U8.36 U9.32 U12.74 U14.31
PE12/FSMC_D9: CN8.15 CN9.24 U8.38 U9.33 U12.75 U14.29
PE13/FSMC_D10: CN8.16 CN9.25 U8.40 U9.34 U12.76 U14.28
PE14/FSMC_D11: CN8.17 CN9.26 U8.42 U9.35 U12.77 U14.27
PE15/FSMC_D12: CN8.18 CN9.27 U8.45 U9.38 U12.78 U14.26
PF0/FSMC_A0: U8.31 U9.5 U12.16
PF1/FSMC_A1: U8.26 U9.4 U12.17
PF2/FSMC_A2: U8.25 U9.3 U12.18
PF3/FSMC_A3: U8.24 U9.2 U12.19
PF4/FSMC_A4: U8.23 U9.1 U12.20
PF5/FSMC_A5: U8.22 U9.48 U12.21
PF6/LCD_PWM: CN8.28 U12.24
PF7/NRF24L01_CSN: CN19.4 LD2.2 R106.1 U12.25
PF8/SF_CS: LD3.2 R38.1 U12.26 U13.1
PF9/ADC3_IN7: R87.2 U12.27
PF10/ADC3_IN8: R64.1 U12.28
PF11/JOY_L/PS2_DATA: R121.1 R139.1 U12.59
PF12/FSMC_A6: U8.21 U9.47 U12.60
PF13/FSMC_A7: U8.20 U9.46 U12.63
PF14/FSMC_A8: U8.10 U9.45 U12.64
PF15/FSMC_A9: U8.9 U9.30 U12.65
PG0/FSMC_A10: U8.8 U9.29 U12.66
PG1/FSMC_A11: U8.7 U9.28 U12.67
PG2/FSMC_A12: U8.6 U9.27 U12.106
PG3/FSMC_A13: U8.5 U9.26 U12.107
PG4/FSMC_A14: U8.4 U9.25 U12.108
PG5/FSMC_A15: U8.3 U9.24 U12.109
PG6/FSMC_INT2: R33.1 U12.110
PG7/JOY_R/PS2_CLK: R105.1 R138.1 U12.111
PG8/USART6_RTS: CN16.5 U12.112
PG9/FSMC_NE2: R32.2 U12.152
PG10/FSMC_NE3: R143.1 U12.153
PG11/ETH_RMII_TX_EN: U11.21 U12.154
PG12/FSMC_NE4: R132.2 U12.155
PG13/FSMC_A24/ETH_RMII_TXD0: U11.20 U12.156
PG14/USART6_TX/ETH_RMII_TXD1: CN16.3 R13.1 U12.157
PG15/USART6_CTS: CN16.6 U12.160
PH0-OSC_IN: C46.2 U12.29 X2.2
PH1-OSC_OUT: C47.2 U12.30 X2.1
PH2/JOY_U: R110.1 U12.43
PH3/JOY_D: R72.1 U12.44
PH4/I2C2_SCL: R137.2 U12.45
PH5/I2C2_SDA: R140.2 U12.46
PH6/MII_INT: R71.2 U12.83
PH7/NRF24L01_IRQ: CN19.8 R109.2 U12.84
PH8/DCMI_HSYNC: NR3.8 U12.85
PH9/DCMI_D0/AD7606_OS0: CN9.3 NR2.8 R108.1 U12.86
PH10/DCMI_D1/AD7606_OS1: CN9.4 NR2.6 R126.2 U12.87
PH11/DCMI_D2/AD7606_OS2: CN9.5 NR2.4 R141.1 U12.88
PH12/DCMI_D3/AD7606_CONVST: CN9.7 CN9.8 NR2.2 U12.89
PH13/CAN1_TX: U1.1 U12.128
PH14/DCMI_D4/AD7606_RAGE: CN9.6 NR1.8 U12.129
PH15/JOY_OK: R103.1 U12.130
PHY_1.8V: C33.1 C51.1 C116.1 CN4.4 CN4.5 U11.1 U11.2 U11.9
PHY_2.5V: C119.1 C120.1 CN2.4 CN2.5 U14.2 U14.9
PHY_3.3V: C25.2 C27.2 C28.2 C117.1 L15.2 R59.1 R60.1 R76.2 R83.1 R86.1 R88.2 R89.2 R94.1 R160.1 U11.23 U11.30 U11.31 U11.41 X4.4
PI0/GPRS_TERM_ON: CN16.7 U12.131
PI1/MPU-6050_INT: R154.1 U12.132
PI2/I2S2EXT_SD: R136.2 U12.133
PI3/TP_INT: CN8.27 U12.134
PI4/DCMI_D5/AD7606_RESET: CN9.9 NR1.6 U12.173
PI5/DCMI_VSYNC: NR3.2 U12.174
PI6/DCMI_D6/AD7606_BUSY: CN9.12 NR1.4 U12.175
PI7/DCMI_D7/NRF905_CD: NR1.2 R44.2 U12.176
PI8/KEY1: R120.1 U12.7
PI9/CAN1_RX: R69.1 U12.11
PI10/TP_NCS: CN8.23 LD1.2 R113.2 U12.12
PI11/KEY3: R118.1 U12.13
RD+: CN4.3 R90.1 U11.7
RD-: CN4.6 R91.1 U11.8
RIN: C12.1 U2.5
RIP: C103.1 U2.4
RS232_1_RX: CN5.3 U15.13
RS232_1_TX: CN5.2 U15.14
RS485_A: CN33.1 R2.2 R3.1 U4.6
RS485_B: CN33.2 R3.2 R4.1 U4.7
SPEEDLED1: CN2.11 U14.39
SPEEDLED2: CN4.11 Q1.3
SPK_INN: CN12.2 U2.23
SPK_INP: CN12.1 U2.25
TD+: CN4.1 R92.1 U11.3
TD-: CN4.2 R93.1 U11.4
TPRX+: CN2.3 R52.1 U14.3
TPRX-: CN2.6 R53.1 U14.4
TPTX+: CN2.1 R54.1 U14.7
TPTX-: CN2.2 R56.1 U14.8
VBAT: D3.3 U12.6
VDD3.3V: C3.1 C7.2 C9.2 C11.1 C19.2 C20.2 C21.2 C22.1 C23.2 C36.2 C43.2 C49.2 C59.2 C69.2 C83.2 C84.2 C85.2 C86.2 C87.2 C88.2 C89.2 C90.2 C91.2 C92.2 C94.2 C96.1 C98.1 C99.2 C100.1 C122.2 C124.2 C128.2 C129.2 C144.2 CN3.4 CN6.1 CN9.13 CN12.5 CN19.2 CN21.1 CN22.4 CN23.1 D1.1 D3.1 J2.2 J11.3 L1.1 L2.1 L15.1 L16.1 L20.2 R2.1 R9.1 R10.1 R12.2 R14.2 R15.2 R19.2 R20.2 R21.2 R22.2 R23.1 R24.1 R25.1 R29.2 R30.2 R31.2 R38.2 R39.2 R48.2 R49.2 R50.2 R51.2 R65.2 R67.1 R80.2 R84.2 R85.2 R104.1 R106.2 R109.1 R111.2 R112.2 R113.1 R123.2 R124.2 R128.2 R131.1 R134.1 R142.2 R144.1 R152.2 R164.2 U3.12 U3.37 U4.8 U7.2 U7.4 U8.29 U8.43 U8.53 U9.12 U9.36 U10.8 U12.15 U12.23 U12.36 U12.49 U12.62 U12.72 U12.82 U12.91 U12.103 U12.114 U12.127 U12.136 U12.149 U12.159 U12.172 U13.3 U13.7 U13.8 U15.16 U17.16 U18.1 U20.8 U20.13 U21.2 U21.4 U21.13 U24.3 U24.4 U27.3
VDD_AUDIO: C8.2 C26.1 C30.2 C41.2 C64.2 L2.2 R35.1 U2.13 U2.14 U2.31
VDD_FM: C105.2 C106.1 L20.1 L21.1 U6.10
VDD_USB: CN25.1 J3.3
VREF_2.5V: C39.2 C114.2 D2.1 D2.2 J1.1 R149.1
WM8978_L2: C35.1 U2.3
WM8978_R2: C63.1 U2.6
XCLK_24M: R63.2 X6.3
pads on no net: C76.2 C77.2 CN1.5 CN1.6 CN1.7 CN2.7 CN2.15 CN2.16 CN3.14 CN3.15 CN4.7 CN4.15 CN4.16 CN5.1 CN5.9 CN9.31 CN9.32 CN12.3 CN13.3 CN13.4 CN14.2 CN14.6 CN14.7 CN14.8 CN14.9 CN17.5 CN17.6 CN17.7 CN21.5 CN22.11 CN22.12 CN25.8 CN25.9 CN26.13 CN26.14 CN30.5 CN30.6 CN30.7 HOLE1.1 HOLE2.1 HOLE3.1 HOLE4.1 HOLE5.1 HOLE6.1 HOLE7.1 HOLE8.1 HOLE9.1 HOLE10.1 HOLE11.1 HOLE12.1 HOLE13.1 HOLE14.1 HOLE15.1 HOLE16.1 NR3.5 NR3.6 R157.2 S1.2 S1.4 S2.2 S2.4 S3.2 S3.4 S4.1 S4.3 S5.7 S5.8 S6.1 S6.4 S6.5 U1.5 U2.15 U3.1 U3.2 U3.3 U3.4 U3.5 U3.6 U3.10 U3.11 U3.14 U3.15 U3.20 U3.21 U3.22 U3.23 U3.24 U3.25 U3.26 U3.27 U3.28 U3.33 U3.34 U3.35 U3.38 U3.39 U3.40 U3.45 U3.46 U3.47 U3.48 U6.1 U6.15 U6.16 U6.18 U6.19 U6.20 U8.27 U8.28 U8.30 U8.55 U8.56 U9.6 U9.19 U9.31 U11.16 U11.17 U11.18 U11.22 U11.26 U11.27 U11.34 U11.35 U11.45 U14.19 U14.46 U15.7 U15.8 U15.9 U15.10 U17.5 U17.7 U17.9 U19.5 U20.2 U20.3 U20.4 U20.5 U20.11 U20.14 U20.15 U20.16 U20.17 U20.19 U20.21 U20.22 U21.3 U21.5 U21.6 U21.7 U21.14 U22.3 U24.2 U24.5 X1.3 X1.4 X3.3 X3.4 X4.1 X6.1

## Keep-outs
Keep-Out Layer:
  the board outline again, w10

## Silkscreen, mask and mechanical layers (free items; w line width, h text height)
Silkscreen Top:
  drawing of 698 lines, arcs and shapes, not listed
  text "ON" at 794.41,5288.11 h80
  text "OFF" at 199.41,5283.11 h80
  text "NRF905" at 3779.41,5108.11 h80 r90
  text "CAMERA" at 4684.41,5103.11 h80 r90
  text "NRST" at 859.41,5058.11 h30
  text "CLK" at 999.41,5058.11 h30
  text "DIO" at 1109.41,5058.11 h30
  text "GND" at 1199.41,5058.11 h30
  text "3.3V" at 1309.41,5058.11 h30
  text "SDIO WIFI" at 2389.41,5043.11 h80
  text "NRF24L01+" at 3179.41,5033.11 h80
  text "USB" at 494.41,4953.11 h30
  text "Ext" at 719.41,4953.11 h30
  text "PF7" at 3439.41,4898.11 h30 r90
  text "PB5" at 3504.41,4898.11 h30 r90
  text "PH7" at 3574.41,4898.11 h30 r90
  text "3.3V" at 3364.41,4888.11 h30 r90
  text "PB1" at 4289.41,4848.11 h30
  text "D1" at 2514.41,4818.11 h30 r90
  text "GND" at 2444.41,4798.11 h30 r90
  text "PE2" at 2584.41,4798.11 h30 r90
  text "CMD" at 2304.41,4793.11 h30 r90
  text "3.3V" at 2379.41,4788.11 h30 r90
  text "GND" at 3364.41,4773.11 h30 r90
  text "PA4" at 3434.41,4773.11 h30 r90
  text "PB3" at 3504.41,4773.11 h30 r90
  text "PB4" at 3574.41,4773.11 h30 r90
  text "DS18B20" at 3639.41,4768.11 h80
  text "DTH11" at 4344.41,4763.11 h80
  text "3.3V" at 3024.41,4693.11 h30
  text "D3" at 2304.41,4688.11 h30 r90
  text "CK" at 2444.41,4683.11 h30 r90
  text "D0" at 2514.41,4683.11 h30 r90
  text "D2" at 2584.41,4683.11 h30 r90
  text "GND" at 2374.41,4673.11 h30 r90
  text "." at 5424.41,4638.11 h40
  text "GPS" at 6754.41,4618.11 h80
  text "DC Input" at -120.59,4613.11 h80
  text "VDD" at 3024.41,4588.11 h30
  text "Ambient" at 6524.41,4548.11 h100 r90
  text "Light" at 6599.41,4548.11 h100 r90
  text "5.0V" at 3024.41,4488.11 h30
  text "8Bit BUS (For OLED)" at 1759.41,4428.11 h80
  text "SPI Flash" at 4034.41,4423.11 h80
  text "MEMS" at 5459.41,4318.11 h80
  text "NOR Flash" at 4184.41,4013.11 h80
  text "16Bit BUS (For AD7606)" at 4954.41,3803.11 h80
  text "NAND Flash" at 5969.41,3748.11 h80
  text "TFT-LCD" at 6659.41,3098.11 h80 r90
  text "SRAM" at 4544.41,2508.11 h80 r90
  text "-" at 3669.41,1613.11 h30
  text "COM1" at -90.59,1603.11 h80 r270
  text "+" at 4374.41,1603.11 h30
  text "Audio" at 5149.41,1438.11 h80
  text "CR1220" at 3524.41,1413.11 h70
  text "CODEC" at 5144.41,1368.11 h80
  text "3.0V" at 3524.41,1348.11 h70
  text "PB13" at 1484.41,1158.11 h30 r90
  text "PB12" at 1654.41,1158.11 h30 r90
  text "PB5" at 1859.41,1158.11 h30 r90
  text "PB6" at 1284.41,1153.11 h30 r90
  text "CAN2" at 1304.41,988.11 h30
  text "CAN2" at 1679.41,983.11 h30
  text "TX" at 1339.41,938.11 h30
  text "RX" at 1714.41,933.11 h30
  text "Pressure" at 6149.41,933.11 h100 r90
  text "Sensor" at 6229.41,928.11 h100 r90
  text "STM32-V5" at 1999.41,588.11 h140
  text "RESET" at 169.41,548.11 h80 r270
  text "GPRS" at 6669.41,433.11 h80 r90
  text "FM/AM" at 4379.41,423.11 h80
  text "ISP_EN" at 184.41,263.11 h65
  text "MIC" at 4719.41,-51.89 h80
  text "485-A" at 439.41,-101.89 h30
  text "485-B" at 634.41,-101.89 h30
  text "CANL2" at 829.41,-101.89 h30
  text "CANH2" at 1034.41,-101.89 h30
  text "CANL1" at 1229.41,-101.89 h30
  text "CANH1" at 1434.41,-101.89 h30
  text "+5V" at 1649.41,-101.89 h30
  text "GND" at 1849.41,-101.89 h30
  text "PS/2" at 2624.41,-106.89 h80
  text "K1" at 3084.41,-106.89 h80
  text "K2" at 3439.41,-106.89 h80
  text "K3" at 3789.41,-106.89 h80
  text "JOYSTICK" at 4034.41,-106.89 h80
  text "MIC_IN" at 5249.41,-106.89 h30
  text "LINE_IN" at 6124.41,-106.89 h30
  text "EAR" at 5684.41,-111.89 h30
Silkscreen Bottom:
  drawing of 187 lines, arcs and shapes, not listed
  text "PH10" at 4704.41,5073.11 h30 r90
  text "PH12" at 4774.41,5073.11 h30 r90
  text "PI4" at 4844.41,5073.11 h30 r90
  text "PI7" at 4914.41,5073.11 h30 r90
  text "PH8" at 4984.41,5073.11 h30 r90
  text "PI5" at 5054.41,5073.11 h30 r90
  text "SCL" at 5124.41,5073.11 h30 r90
  text "VCC" at 5194.41,5073.11 h30 r90
  text "3.3V" at 3279.41,4983.11 h30 r90
  text "PF7" at 3349.41,4978.11 h30 r90
  text "PB5" at 3419.41,4978.11 h30 r90
  text "PH7" at 3489.41,4978.11 h30 r90
  text "PH9" at 4704.41,4948.11 h30 r90
  text "PH11" at 4774.41,4948.11 h30 r90
  text "PH14" at 4844.41,4948.11 h30 r90
  text "PI6" at 4914.41,4948.11 h30 r90
  text "24M" at 4984.41,4948.11 h30 r90
  text "PA6" at 5054.41,4948.11 h30 r90
  text "SDA" at 5124.41,4948.11 h30 r90
  text "GND" at 5194.41,4948.11 h30 r90
  text "CMD" at 2244.41,4918.11 h30 r90
  text "3.3V" at 2314.41,4918.11 h30 r90
  text "PE2" at 2524.41,4918.11 h30 r90
  text "GND" at 2384.41,4913.11 h30 r90
  text "D1" at 2459.41,4913.11 h30 r90
  text "GND" at 5724.41,4878.11 h30 r90
  text "PH10" at 5794.41,4878.11 h30 r90
  text "PA5" at 5864.41,4878.11 h30 r90
  text "GND" at 5934.41,4878.11 h30 r90
  text "PC0" at 6004.41,4878.11 h30 r90
  text "PF9" at 6074.41,4878.11 h30 r90
  text "GND" at 3279.41,4848.11 h30 r90
  text "PA4" at 3349.41,4848.11 h30 r90
  text "PB3" at 3419.41,4848.11 h30 r90
  text "PB4" at 3489.41,4848.11 h30 r90
  text "PA4" at 3779.41,4848.11 h30 r90
  text "PB6" at 3849.41,4848.11 h30 r90
  text "PI7" at 3924.41,4848.11 h30 r90
  text "PB8" at 3989.41,4848.11 h30 r90
  text "PB5" at 4059.41,4848.11 h30 r90
  text "PI2" at 4129.41,4848.11 h30 r90
  text "GND" at 4199.41,4848.11 h30 r90
  text "GND" at 2314.41,4788.11 h30 r90
  text "CK" at 2384.41,4788.11 h30 r90
  text "D3" at 2244.41,4783.11 h30 r90
  text "D0" at 2454.41,4783.11 h30 r90
  text "D2" at 2524.41,4783.11 h30 r90
  text "5.0V" at 5724.41,4753.11 h30 r90
  text "PH9" at 5794.41,4753.11 h30 r90
  text "PH11" at 5864.41,4753.11 h30 r90
  text "PA4" at 5934.41,4753.11 h30 r90
  text "PA0" at 6004.41,4753.11 h30 r90
  text "PF10" at 6074.41,4753.11 h30 r90
  text "3.3V" at 6489.41,4738.11 h30
  text "BAT" at 6609.41,4738.11 h30
  text "3.3V" at 3779.41,4728.11 h30 r90
  text "PA5" at 3849.41,4718.11 h30 r90
  text "PB9" at 3989.41,4713.11 h30 r90
  text "PB4" at 4059.41,4713.11 h30 r90
  text "PB3" at 4129.41,4713.11 h30 r90
  text "GND" at 4199.41,4713.11 h30 r90
  text "3.3V" at 3124.41,4688.11 h30
  text "GND" at 6479.41,4673.11 h30
  text "GND" at 6609.41,4673.11 h30
  text "PA3" at 6479.41,4608.11 h30
  text "PA2" at 6609.41,4608.11 h30
  text "VDD" at 2894.41,4588.11 h30
  text "5.0V" at 3124.41,4488.11 h30
  text "GND" at 4274.41,4443.11 h30 r90
  text "PH10" at 4344.41,4443.11 h30 r90
  text "PH14" at 4414.41,4443.11 h30 r90
  text "PH12" at 4484.41,4443.11 h30 r90
  text "NOE" at 4554.41,4443.11 h30 r90
  text "PI6" at 4624.41,4443.11 h30 r90
  text "NWE" at 4694.41,4443.11 h30 r90
  text "D1" at 4764.41,4443.11 h30 r90
  text "D3" at 4834.41,4443.11 h30 r90
  text "D5" at 4904.41,4443.11 h30 r90
  text "D7" at 4974.41,4443.11 h30 r90
  text "D9" at 5044.41,4443.11 h30 r90
  text "D11" at 5114.41,4443.11 h30 r90
  text "D13" at 5184.41,4443.11 h30 r90
  text "D15" at 5254.41,4443.11 h30 r90
  text "5.0V" at 4274.41,4323.11 h30 r90
  text "PH9" at 4344.41,4318.11 h30 r90
  text "PH11" at 4414.41,4318.11 h30 r90
  text "PH12" at 4484.41,4318.11 h30 r90
  text "PI4" at 4554.41,4318.11 h30 r90
  text "NCS" at 4624.41,4318.11 h30 r90
  text "3.3V" at 4694.41,4318.11 h30 r90
  text "D0" at 4764.41,4318.11 h30 r90
  text "D2" at 4834.41,4318.11 h30 r90
  text "D4" at 4904.41,4318.11 h30 r90
  text "D6" at 4974.41,4318.11 h30 r90
  text "D8" at 5044.41,4318.11 h30 r90
  text "D10" at 5114.41,4318.11 h30 r90
  text "D12" at 5184.41,4318.11 h30 r90
  text "D14" at 5254.41,4318.11 h30 r90
  text "GND" at 2599.41,4173.11 h30 r90
  text "NWE" at 2949.41,4173.11 h30 r90
  text "RST" at 3019.41,4173.11 h30 r90
  text "GND" at 3089.41,4173.11 h30 r90
  text "D6" at 2669.41,4168.11 h30 r90
  text "D4" at 2744.41,4168.11 h30 r90
  text "D2" at 2809.41,4168.11 h30 r90
  text "D0" at 2879.41,4168.11 h30 r90
  text "D7" at 2599.41,4048.11 h30 r90
  text "D5" at 2669.41,4048.11 h30 r90
  text "D3" at 2739.41,4048.11 h30 r90
  text "D1" at 2809.41,4048.11 h30 r90
  text "NOE" at 2879.41,4048.11 h30 r90
  text "RS" at 2949.41,4048.11 h30 r90
  text "NCS" at 3019.41,4048.11 h30 r90
  text "VDD" at 3089.41,4048.11 h30 r90
  text "3.3V" at 6224.41,2633.11 h30
  text "GND" at 6369.41,2633.11 h30
  text "PF6" at 6054.41,2568.11 h30
  text "PWM" at 6219.41,2568.11 h30
  text "INT" at 6364.41,2568.11 h30
  text "PI3" at 6469.41,2568.11 h30
  text "PB5" at 6059.41,2503.11 h30
  text "MOSI" at 6214.41,2503.11 h30
  text "MISO" at 6364.41,2503.11 h30
  text "PB4" at 6484.41,2503.11 h30
  text "PB3" at 6059.41,2438.11 h30
  text "SCK" at 6214.41,2438.11 h30
  text "SCS" at 6364.41,2438.11 h30
  text "PI10" at 6484.41,2438.11 h30
  text "PD3" at 6059.41,2373.11 h30
  text "BUSY" at 6214.41,2373.11 h30
  text "D15" at 6364.41,2373.11 h30
  text "PD10" at 6504.41,2373.11 h30
  text "PD9" at 6059.41,2308.11 h30
  text "D14" at 6214.41,2308.11 h30
  text "D13" at 6364.41,2308.11 h30
  text "PD8" at 6489.41,2308.11 h30
  text "PE15" at 6059.41,2243.11 h30
  text "D12" at 6214.41,2243.11 h30
  text "D11" at 6364.41,2243.11 h30
  text "PE14" at 6499.41,2243.11 h30
  text "PE13" at 6059.41,2178.11 h30
  text "D10" at 6214.41,2178.11 h30
  text "D9" at 6364.41,2178.11 h30
  text "PE12" at 6499.41,2178.11 h30
  text "PE11" at 6059.41,2118.11 h30
  text "D8" at 6214.41,2118.11 h30
  text "D7" at 6364.41,2118.11 h30
  text "PE10" at 6499.41,2118.11 h30
  text "PE9" at 6059.41,2053.11 h30
  text "D6" at 6214.41,2053.11 h30
  text "D5" at 6364.41,2053.11 h30
  text "PE8" at 6484.41,2053.11 h30
  text "D4" at 6214.41,1988.11 h30
  text "D3" at 6364.41,1988.11 h30
  text "PD1" at 6484.41,1988.11 h30
  text "PE7" at 6059.41,1983.11 h30
  text "D2" at 6214.41,1923.11 h30
  text "D1" at 6364.41,1923.11 h30
  text "PD15" at 6504.41,1923.11 h30
  text "PD0" at 6064.41,1918.11 h30
  text "PD14" at 6064.41,1858.11 h30
  text "D0" at 6214.41,1858.11 h30
  text "NRST" at 6364.41,1858.11 h30
  text "PD4" at 6064.41,1793.11 h30
  text "NOE" at 6214.41,1793.11 h30
  text "NWE" at 6364.41,1793.11 h30
  text "PD5" at 6484.41,1788.11 h30
  text "PD13" at 6064.41,1733.11 h30
  text "A18" at 6214.41,1728.11 h30
  text "NCS" at 6364.41,1728.11 h30
  text "NE4" at 6479.41,1728.11 h30
  text "GND" at 6339.41,703.11 h30
  text "5V" at 6459.41,703.11 h30
  text "PG14" at 6334.41,638.11 h30
  text "PC7" at 6459.41,638.11 h30
  text "PG8" at 6329.41,573.11 h30
  text "PG15" at 6469.41,573.11 h30
  text "PI0" at 6329.41,508.11 h30
  text "PB7" at 6469.41,508.11 h30
  text "FM Antenna" at 4224.41,248.11 h80
  text "AM Antenna" at 6279.41,243.11 h80
  text "D030-2" at 344.41,-96.89 h30
Drill Drawing:
  lines w10: -314.96,649.61 7009.41,649.61